# EAGLE board thermocouple (EAGLE 4.16)
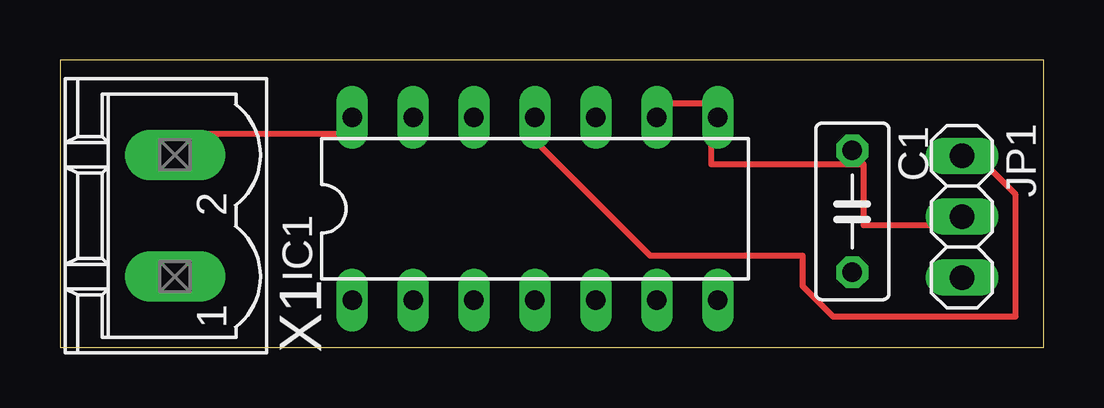
[diagram p0: board, top side]
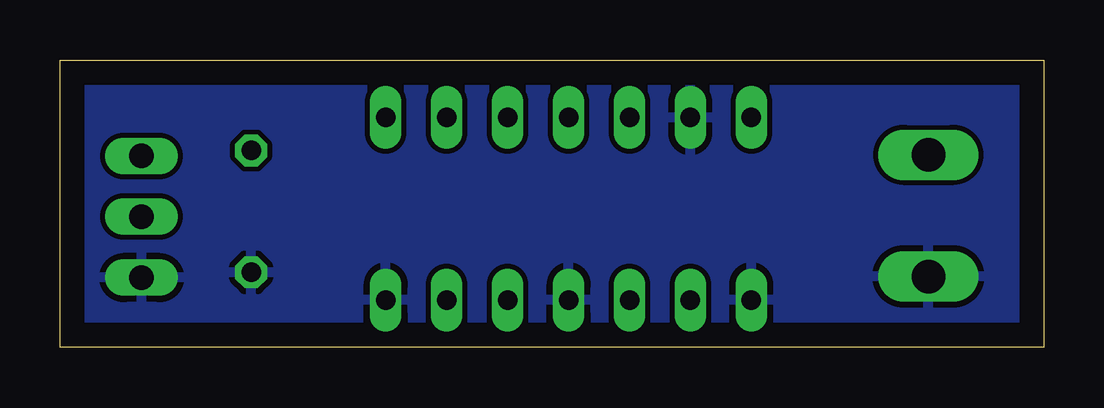
[diagram p1: board, bottom side, seen from below]

Size 41 x 12 mm. Coordinates in mm from the lower left corner, seen from the top.
Outline: 0,0 41,0 41,12 0,12 0,0
Copper layers (1*16): Top 0.035mm / dielectric 1.5mm / Bottom 0.035mm
Design rules "default": minimum track width 10mil, minimum drill 24mil, track to track 8mil, track to pad 8mil, pad to pad 8mil, via to via 8mil, smd to smd 8mil, copper to edge 40mil, drill to drill 8mil, minimum pad ring 10mil, minimum via ring 8mil, stop-mask expansion 4mil, vias tented up to drill 0mil, thermal gap 10mil

## Footprints (pad centres in the part's own frame; a part is rotated, then mirrored left to right if it is on the bottom)
C050-030X075 = drill 0.813 octagon: 1 -2.54,0; 2 2.54,0
DIL14 = drill 0.813 long: 1 -7.62,-3.81; 2 -5.08,-3.81; 3 -2.54,-3.81; 4 0,-3.81; 5 2.54,-3.81; 6 5.08,-3.81; 7 7.62,-3.81; 8 7.62,3.81; 9 5.08,3.81; 10 2.54,3.81; 11 0,3.81; 12 -2.54,3.81; 13 -5.08,3.81; 14 -7.62,3.81
1X03 = drill 1.016 long: 1 -2.54,0; 2 0,0; 3 2.54,0
MSTBV2 = drill 1.397 long: 1 -2.54,0; 2 2.54,0

## Placement (x,y rotation side)
C1  0.1uF  [C050-030X075]  33.03,5.68 270 top
IC1  [DIL14]  19.8,5.79 0 top
JP1  [1X03]  37.6,5.46 270 top
X1  MST2V  [MSTBV2]  4.8,5.5 90 top

## Library data of the parts
C1 = rcl
IC1 = analog-devices
JP1 = pinhead
X1 = con-phoenix-508

## Nets
GND: C1.2 IC1.1 IC1.4 IC1.7 IC1.13 JP1.3 X1.1
N$2: C1.1 IC1.8 IC1.9 JP1.2
N$4: IC1.14 X1.2
VCC: IC1.11 JP1.1

## Tracks (layer width: path | path; a pad name or v marks a point on that pad's centre or on a via)
GND
  pour Bottom: 0.47,11.63 40.47,11.63 40.47,0.63 0.47,0.63
N$2
  Top 0.254: 33.49,7.65 27.14,7.65 27.14,8.92 IC1.8 27.14,10.19 24.6,10.19 IC1.9 | 33.49,7.65 33.49,5.11 37.3,5.11 JP1.2 | 33.49,7.65 C1.1
N$4
  Top 0.254: IC1.14 11.9,8.92 5.55,8.92 X1.2
VCC
  Top 0.254: IC1.11 19.52,8.92 24.6,3.84 30.95,3.84 30.95,2.57 32.22,1.3 39.84,1.3 39.84,6.38 38.57,7.65 JP1.1